# EAGLE board Hx711_board_V1_r0 (EAGLE 9.6.2)
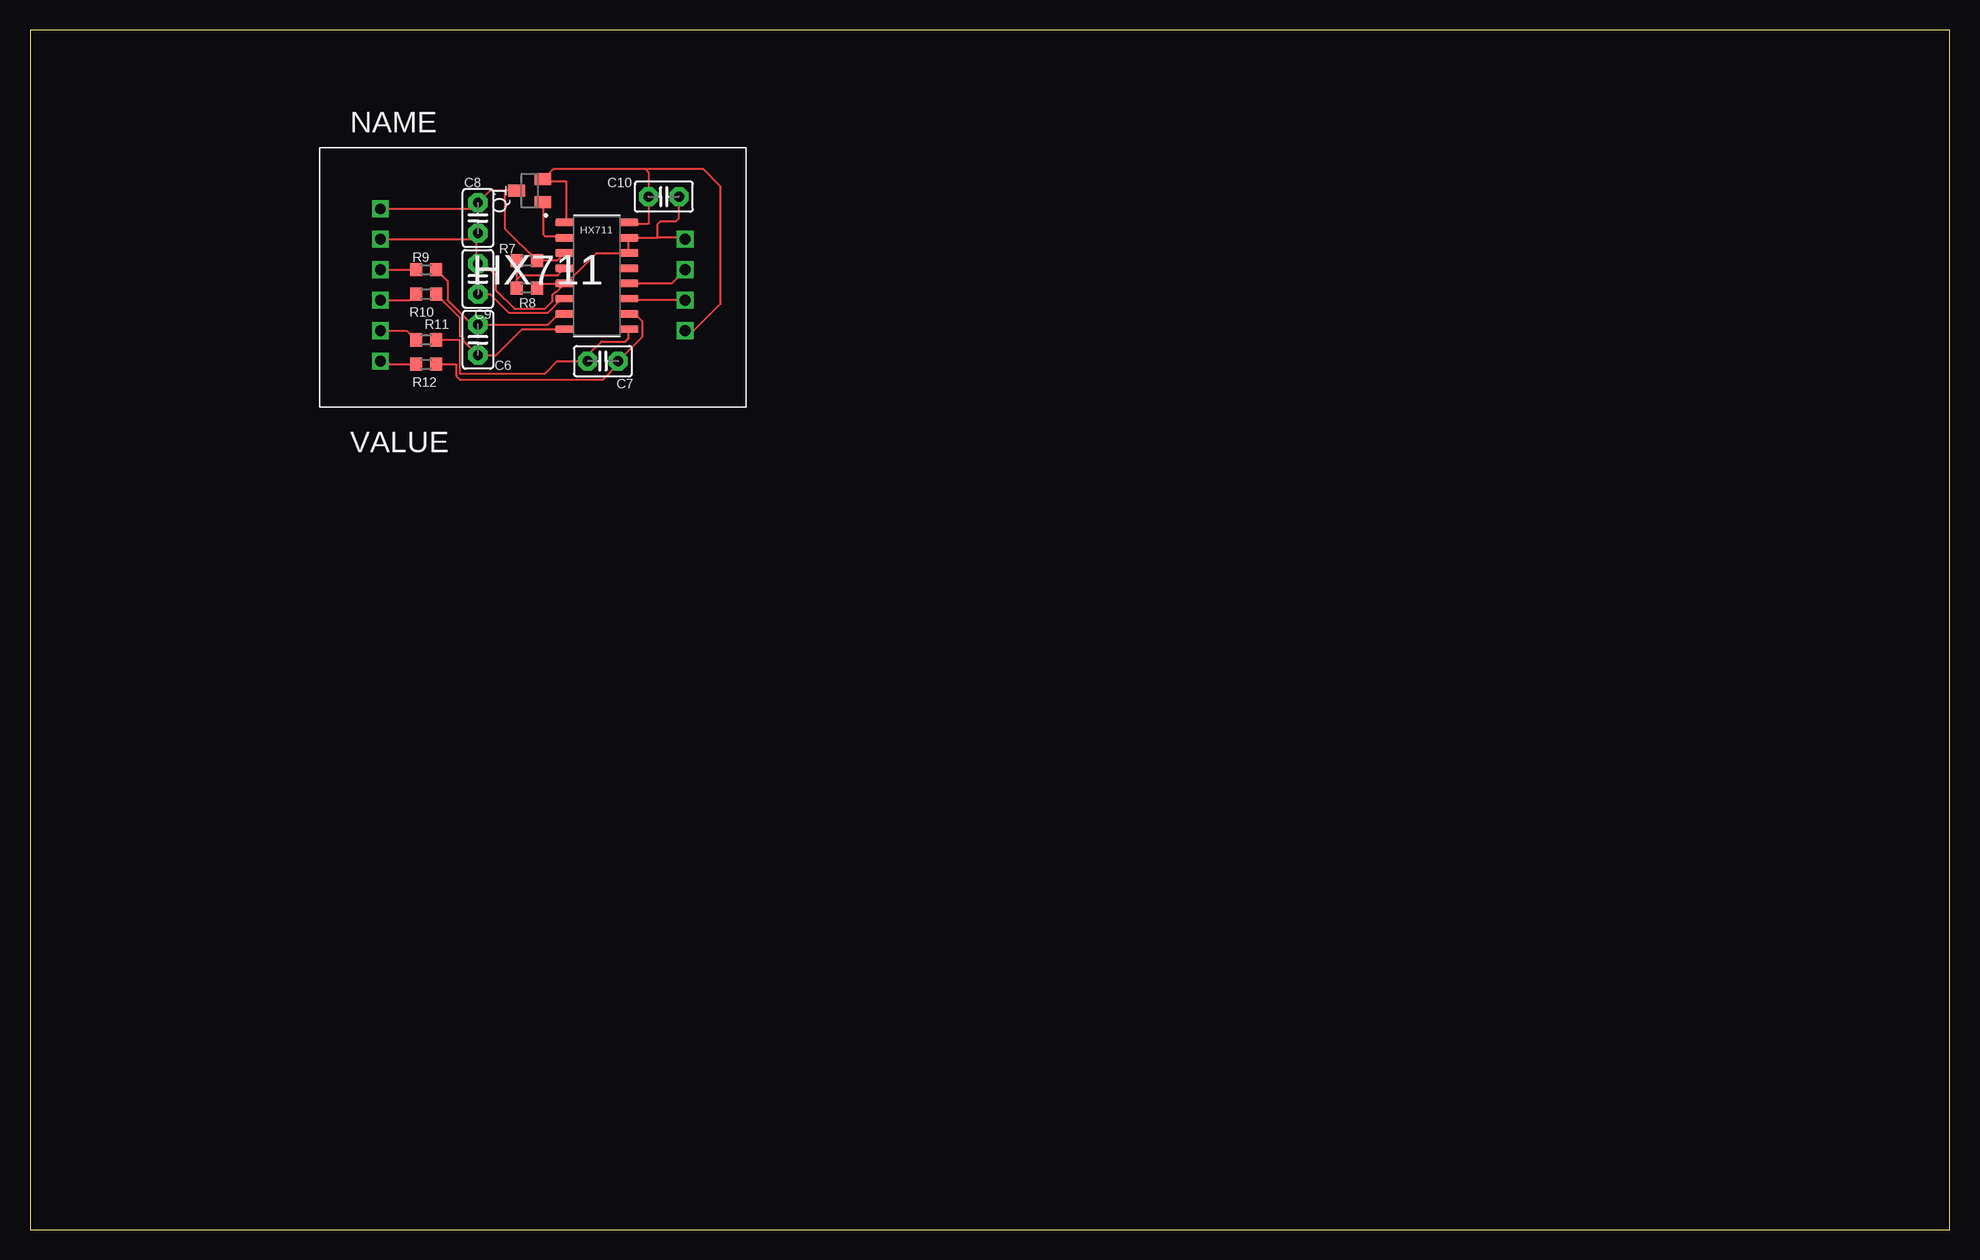
[diagram p0: board, top side]

Size 160 x 100 mm. Coordinates in mm from the lower left corner, seen from the top.
Outline: 0,0 160,0 160,100 0,100 0,0
Copper layers (1*16): Top 0.035mm / dielectric 1.5mm / Bottom 0.035mm
Design rules "default": minimum track width 6mil, minimum drill 0.35mm, track to track 6mil, track to pad 6mil, pad to pad 6mil, via to via 6mil, smd to smd 6mil, copper to edge 40mil, drill to drill 6mil, minimum pad ring 10mil, minimum via ring 8mil, stop-mask expansion 4mil, vias tented up to drill 0mil, thermal gap 10mil

## Footprints (pad centres in the part's own frame; a part is rotated, then mirrored left to right if it is on the bottom)
C2.5-2 = drill 0.813 pad 1.6 octagon: 1 -1.27,0; 2 1.27,0
SOP127P600X180-16N = smd 1.58 x 0.59: 1 -2.67,4.445; 2 -2.67,3.175; 3 -2.67,1.905; 4 -2.67,0.635; 5 -2.67,-0.635; 6 -2.67,-1.905; 7 -2.67,-3.175; 8 -2.67,-4.445; 9 2.67,-4.445; 10 2.67,-3.175; 11 2.67,-1.905; 12 2.67,-0.635; 13 2.67,0.635; 14 2.67,1.905; 15 2.67,3.175; 16 2.67,4.445
SOT23 = smd 1 x 1.4: 1 -0.95,-1.1; 2 0.95,-1.1; 3 0,1.1
R0603 = smd 1 x 1.1: 1 -0.85,0; 2 0.85,0
HX711 = drill 0.9 square: A+ 8.89,21.59; A- 8.89,24.13; B+ 8.89,16.51; B- 8.89,19.05; DT 34.29,24.13; E+ 8.89,29.21; E- 8.89,26.67; GND 34.29,26.67; SCK 34.29,21.59; VCC 34.29,19.05

## Placement (x,y rotation side)
C6  0.1uF  [C2.5-2]  37.34,74.17 270 top
C7  0.1uF  [C2.5-2]  47.75,72.39 0 top
C8  10uF  [C2.5-2]  37.34,84.33 270 top
C9  0.1uF  [C2.5-2]  37.34,79.25 90 top
C10  10uF  [C2.5-2]  52.83,86.11 180 top
HX711  HX711  [SOP127P600X180-16N]  47.24,79.5 0 top
Q1  [SOT23]  41.66,86.61 90 top
R7  20K  [R0603]  41.4,80.77 180 top
R8  8.2K  [R0603]  41.4,78.49 180 top
R9  100  [R0603]  33.02,80.01 0 top
R10  100  [R0603]  33.02,77.98 0 top
R11  100  [R0603]  33.02,74.17 0 top
R12  100  [R0603]  33.02,72.14 0 top
U$1  [HX711]  20.32,55.88 0 top

## Library data of the parts
C6-C10 = capacitor-wima
HX711 = HX711ss; AVAILABILITY: Not in stock; DESCRIPTION: Precision 24-bit analog-to-digital converter (ADC) designed for weigh scales and industrial control applications to interface directly with a bridge sensor.; MF: AVIA SEMICONDUCTOR; MP: HX711; PACKAGE: None; PRICE: None
Q1 = semicon-smd-ipc
R7-R12 = rcl; SPICEPREFIX: R
U$1 = HX711

## Nets
+5V: C10.2 HX711.1 HX711.16 Q1.2 U$1.VCC
A+: R10.1 U$1.A+
A-: R9.1 U$1.A-
AVDD: C8.1 HX711.3 Q1.3 R7.1 U$1.E+
B+: R12.1 U$1.B+
B-: R11.1 U$1.B-
DT: HX711.12 U$1.DT
GND: C8.2 C9.2 C10.1 HX711.5 HX711.14 HX711.15 R8.1 U$1.E- U$1.GND
N$1: HX711.2 Q1.1
N$3: HX711.4 R7.2 R8.2
N$4: C6.1 HX711.7 R9.2
N$5: C6.2 HX711.8 R10.2
N$6: C7.1 HX711.9 R11.2
N$7: C7.2 HX711.10 R12.2
N$8: C9.1 HX711.6
SCK: HX711.11 U$1.SCK

## Tracks (layer width: path | path; a pad name or v marks a point on that pad's centre or on a via)
+5V
  Top 0.152: U$1.VCC 55.33,74.93 57.58,77.18 57.58,86.95 56.13,88.39 51.31,88.39 | 51.31,88.39 43.58,88.39 Q1.2 42.94,87.38 44.7,87.38 44.7,84.08 HX711.1 | 51.31,88.39 51.56,88.14 C10.2 51.56,83.82 50.04,83.82 HX711.16
A+
  Top 0.152: U$1.A+ 31.66,77.47 R10.1
A-
  Top 0.152: U$1.A- R9.1
AVDD
  Top 0.152: U$1.E+ 37.08,85.09 37.34,85.34 C8.1 38.35,86.61 39.62,86.61 | HX711.3 43.94,80.77 R7.1 39.62,83.4 39.62,86.61 | 41.06,86.61 Q1.3 39.62,86.61
B+
  Top 0.152: U$1.B+ 29.72,72.39 29.97,72.14 R12.1
B-
  Top 0.152: U$1.B- 31.41,74.93 R11.1
DT
  Top 0.152: 53.98,79.38 U$1.DT 53.47,78.87 HX711.12
GND
  Top 0.152: 49.78,81.41 HX711.14 | U$1.E- 36.83,82.55 37.21,82.93 | 37.21,82.93 C8.2 | R8.1 42.63,78.87 HX711.5 | 37.21,82.93 37.21,80.64 C9.2 37.85,80.52 38.86,79.5 38.86,78.28 40.39,76.76 42.93,76.76 43.55,77.39 43.55,77.94 43.73,78.12 43.83,78.12 HX711.5 | HX711.5 44.67,78.87 47.21,81.41 HX711.14 | HX711.14 HX711.15 52.32,82.68 | 53.98,82.68 54.1,82.55 U$1.GND 54.48,82.68 52.32,82.68 | 52.32,82.68 52.32,83.82 52.58,84.07 53.85,84.07 54.1,84.33 C10.1
N$1
  Top 0.152: HX711.2 44.45,82.8 42.93,82.8 42.76,82.97 Q1.1
N$3
  Top 0.152: HX711.4 43.94,79.5 40.89,79.5 40.55,79.16 | 40.55,79.16 R8.2 | R7.2 40.55,79.16
N$4
  Top 0.152: R9.2 34.8,79.08 34.8,77.48 36.84,75.44 C6.1 43.18,75.44 44.07,76.33 HX711.7
N$5
  Top 0.152: HX711.8 44.45,75.06 43.82,75.06 41.02,75.06 38.86,72.9 C6.2 36.12,74.12 36.12,74.29 35.94,74.47 35.81,74.47 35.81,76.03 R10.2
N$6
  Top 0.152: R11.2 35.81,74.17 35.81,71.37 42.93,71.37 43.94,72.39 C7.1 46.48,72.9 47.62,74.04 49.66,74.04 49.91,74.3 HX711.9
N$7
  Top 0.152: R12.2 35.51,72.14 35.51,71.25 35.56,71.2 35.56,71.12 35.81,70.87 47.75,70.87 49.02,72.14 C7.2 51.05,74.42 51.05,75.69 50.42,76.33 HX711.10
N$8
  Top 0.152: C9.1 38.35,77.98 39.88,76.45 43.18,76.45 44.32,77.6 HX711.6
SCK
  Top 0.152: U$1.SCK 50.04,77.47 HX711.11